# Altium PCB SensorBoard.PcbDoc (part 5 of 5)
Units mm, origin at the board's own origin, x right, y up, seen from the top; angles counter-clockwise.
Board outline 133.86 x 67.84 mm, 4 copper layers (Top Layer, Power Plane, Ground Plane, Bottom Layer), stack 1.586 mm thick; 244 components, 150 nets, 825 pads, 904 vias.
Unrouted connection lines stored in the file: 43.
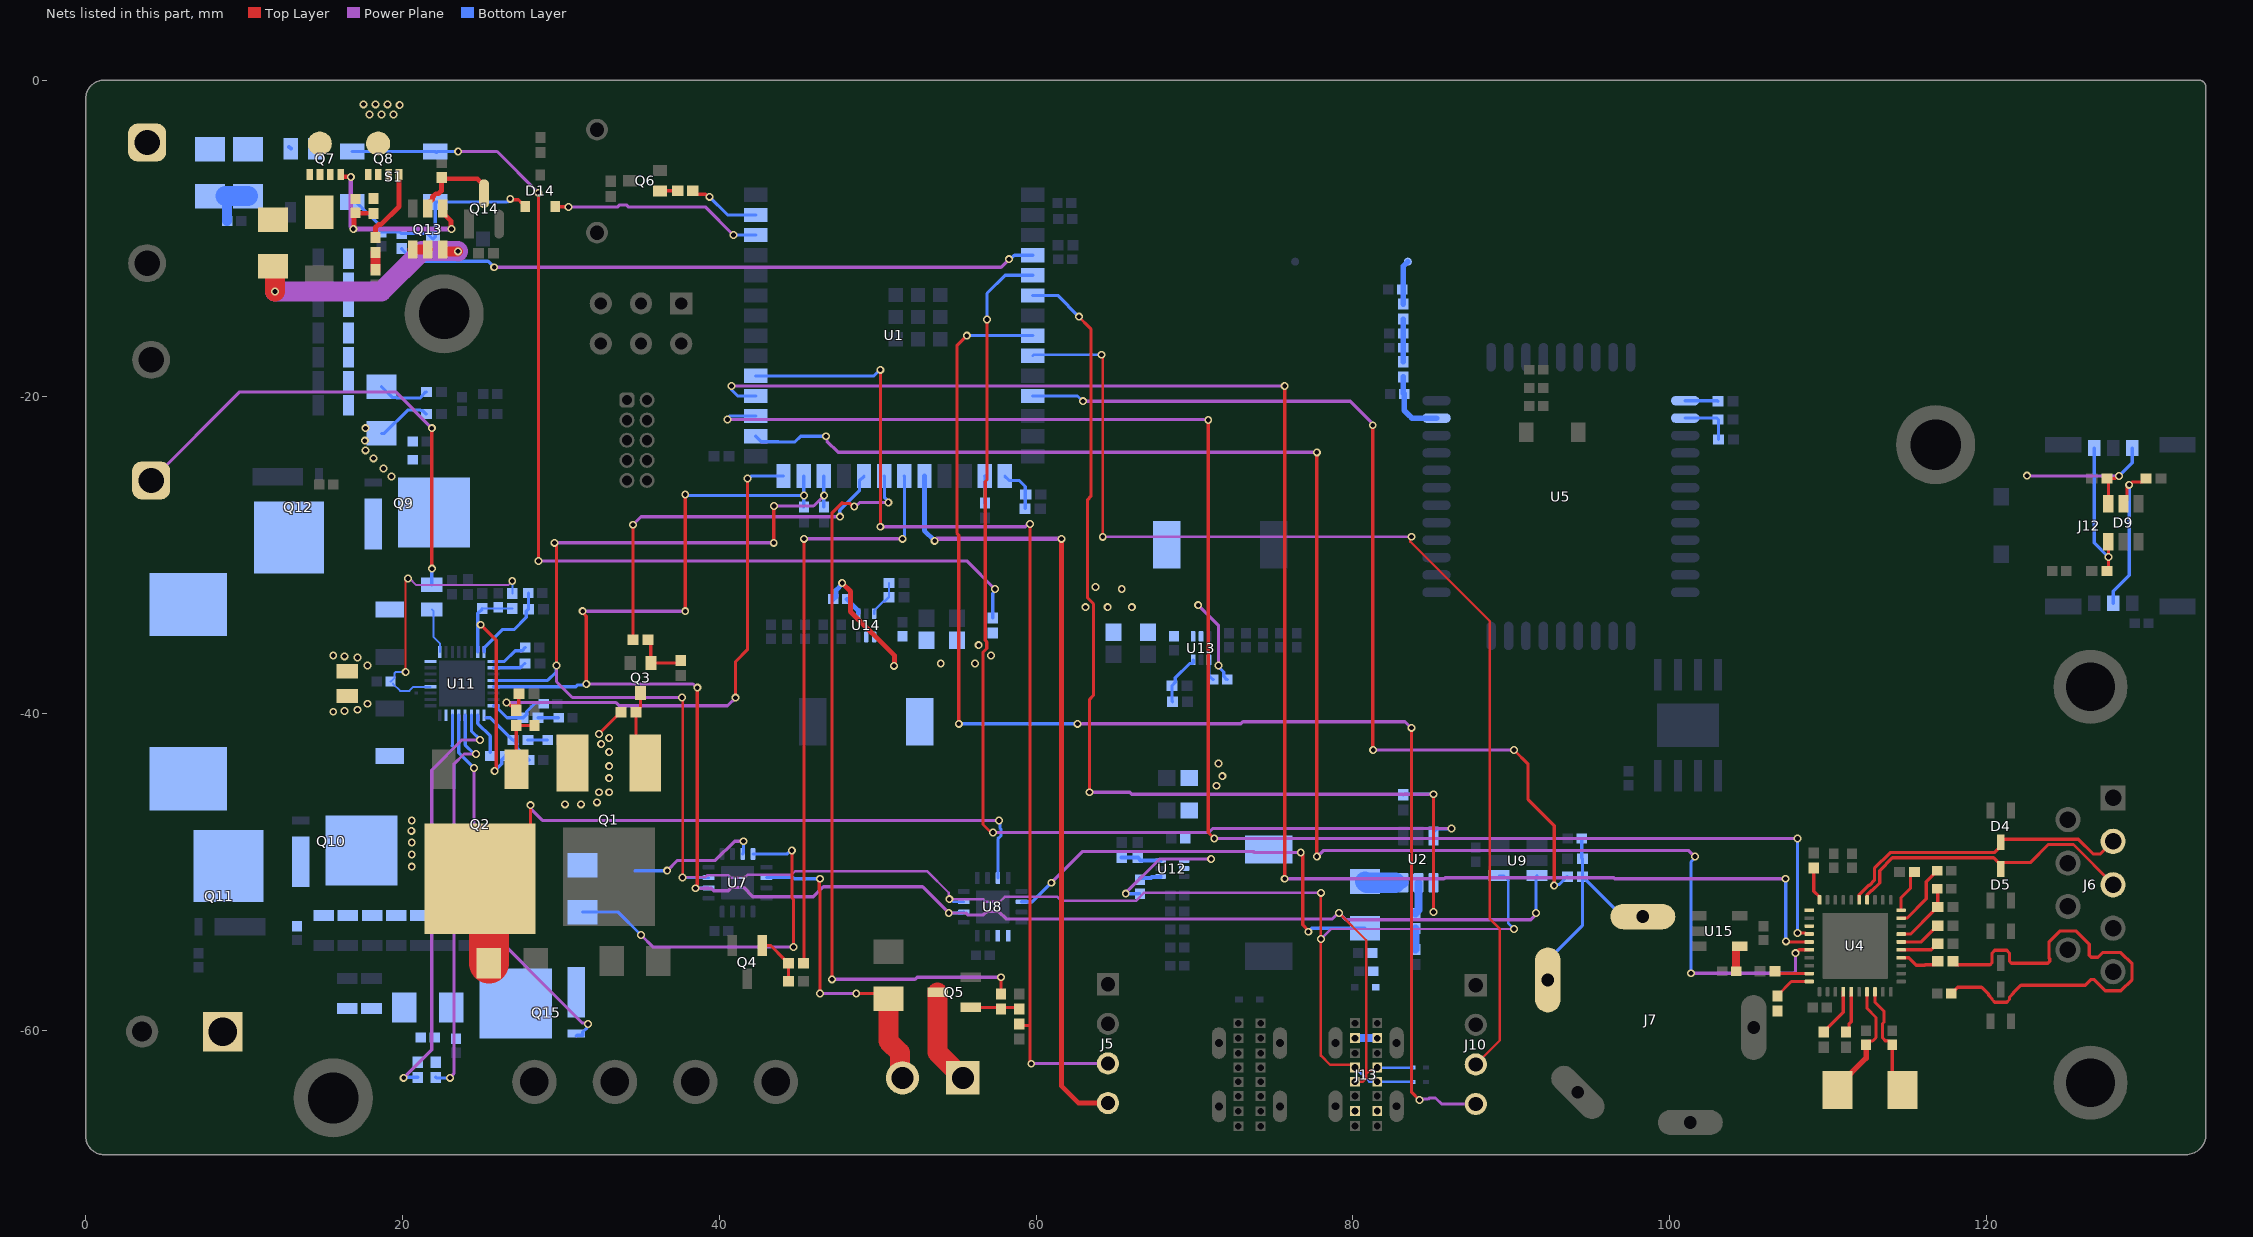
[diagram p5: the nets of this part, all layers, seen from the top]

## Via types
v1: diameter 0.5, hole 0.3, Top Layer to Bottom Layer, tented both sides, 566 vias
v2: diameter 0.5, hole 0.3, Top Layer to Bottom Layer, 318 vias
v3: diameter 0.5, hole 0.2, Top Layer to Bottom Layer, 20 vias

## Nets (pads, with @x,y where several pads share a name; then routed paths per layer and width w, separated by ;. In a path a pad name is that pad's centre, name@x,y a point inside that pad or via, vN(x,y) a via of type N, cw(c..) or ccw(c..) an arc to the next point about the centre after c; other vN are vias at no path point) (continued)
NetC6_2: C6.2 U4.38 Y1.1 | length 7.1
  Top Layer w0.203: U4.38@112.963,-57.56 112.963,-58.226 113.538,-58.801 113.538,-59.459 113.437,-59.56 113.437,-60.47 113.614,-60.647 113.722,-60.647 113.742,-60.667 113.841,-60.667 114.049,-60.875 114.049,-63.104 Y1.1@114.699,-63.754
NetC7_2: C7.2 R28.1 | length 30.2
  Top Layer w0.203: C7.2@117.788,-57.658 117.808,-57.658 118.189,-57.277 119.696,-57.277 120.142,-57.723 120.142,-57.785 120.352,-57.995 120.352,-58.045 120.529,-58.222 121.279,-58.222 121.456,-58.045 121.456,-57.906 121.706,-57.655 121.706,-57.618 122.174,-57.15 126.238,-57.15 126.613,-56.775 126.782,-56.775 127.495,-57.489 128.491,-57.489 129.195,-56.784 129.195,-55.788 128.491,-55.084 127.33,-55.084 127.043,-55.372 126.611,-55.372 126.492,-55.253 126.492,-54.558 125.646,-53.713 124.651,-53.713 123.946,-54.417 123.946,-55.413 123.999,-55.466 123.999,-55.634 123.88,-55.753 121.575,-55.753 121.456,-55.634 121.456,-55.112 121.279,-54.935 120.529,-54.935 120.352,-55.112 120.352,-55.73 120.233,-55.849 118.101,-55.849 R28.1@117.878,-55.626
NetC8_2: C8.2 R32.2 U4.7 | length 4.2
  Top Layer w0.203: U4.7@114.613,-53.91 115.218,-53.91 116.68,-52.448 116.68,-52.423 116.903,-52.2 R32.2@116.928,-52.2 116.928,-51.077 C8.2@116.908,-51.057
NetC9_2: C9.2 U4.9 | length 4.2
  Top Layer w0.203: U4.9@114.613,-52.91 114.626,-52.897 114.997,-52.897 116.205,-51.689 116.205,-50.597 116.888,-49.914 C9.2@116.908,-49.914
NetC10_2: C10.2 U4.37 Y1.2 | length 7.6
  Top Layer w0.203: C10.2@112.398,-60.895 112.398,-60.875 112.606,-60.667 112.813,-60.667 113.03,-60.45 113.03,-59.182 112.463,-58.615 U4.37@112.463,-57.56
  Top Layer w0.35: Y1.2@110.599,-63.754 110.599,-63.504 111.374,-62.729 111.419,-62.729 112.398,-61.75 C10.2@112.398,-60.895
NetC17_2: C17.2 R39.2 U5.32 | length 4.4
  Bottom Layer w0.35: R39.2@83.185,-18.73 83.185,-19.753 ccw(c83.244,-19.753) C17.2@83.244,-19.812 83.244,-20.851 83.488,-21.094 83.731,-21.338 84.076,-21.338 U5.32@85.279,-21.338
NetC18_2: C18.2 C19.2 R39.1 R40.2 | length 2.7
  Bottom Layer w0.35: R39.1@83.185,-17.78 R40.2@83.185,-15.08
NetC20_2: C20.2 R40.1 RF_PCB1.1 | length 2.8
  Bottom Layer w0.35: R40.1@83.185,-14.13 83.185,-11.744 RF_PCB1.1@83.469,-11.46
NetC23_2: C23.2 J7.3 J7.5 R44.1 R45.1 | length 14.7
  Bottom Layer w0.203: J7.5@92.306,-56.809 92.306,-55.559 94.489,-53.376 R44.1@94.489,-50.292 ; C23.2@94.454,-47.879 94.454,-49.114 R45.1@94.489,-49.149 R44.1@94.489,-50.292 ; J7.3@98.306,-52.809 97.031,-52.809 94.514,-50.292 R44.1@94.489,-50.292
NetC27_2: C27.2 C28.2 Q9.5-6-7-8 R47.1 R48.1 R54.2 | length 3.5
  Bottom Layer w0.203: R48.1@18.669,-22.303 18.844,-22.303 20.319,-20.828 21.129,-20.828 21.159,-20.859 21.273,-20.859 R54.2@21.496,-21.082
  other v2: 17.78,-36.957 17.145,-36.449 16.325,-36.377 15.621,-36.322 19.304,-25.019 18.796,-24.511 18.161,-23.876 17.653,-23.368 17.612,-22.758 17.653,-21.971
NetC30_1: C30.1 C31.1 C32.1 C33.1 C44.1 C45.1 C46.1 C47.1 Q8.5-6-7-8 R46.2 R48.2 R53.2 | length 3.3
  Bottom Layer w0.203: R48.2@18.669,-19.353 19.342,-20.026 19.597,-20.026 19.636,-20.066 21.115,-20.066 21.248,-19.933 21.248,-19.908 21.471,-19.685 R53.2@21.496,-19.685
  other v1: 17.907,-2.159 18.669,-2.159 19.431,-2.159 19.812,-1.56 17.526,-1.524 18.288,-1.524 19.05,-1.524
NetC40_2: C40.2 R50.2 R51.2 | length 3
  Bottom Layer w0.635: 8.822,-7.317 8.919,-7.414 C40.2@8.919,-8.89
  Bottom Layer w1.27: 8.822,-7.317 R51.2@10.248,-7.317
NetC43_1: C43.1 Q7.4 Q13.4 R56.1 | length 14.1
  Top Layer w0.305: Q7.4@16.088,-5.945 16.088,-6.038 16.146,-6.096 16.706,-6.096 v2(16.73,-6.12) ; v2(16.891,-9.398) 16.928,-9.361 16.928,-8.472 C43.1@17.018,-8.382 17.035,-8.4 18.143,-8.4 R56.1@18.161,-8.417 ; Q13.4@22.54,-8.098 22.54,-8.373 23.053,-8.886 23.053,-9.361 v2(23.09,-9.398)
  Power Plane w0.305: v2(16.73,-6.12) 16.73,-9.237 v2(16.891,-9.398) v2(23.09,-9.398)
NetC43_2: C43.2 D13.2 Q7.1 Q7.2 Q7.3 Q8.1 Q8.2 Q8.3 R55.1 R56.2
NetC56_2: C56.2 C57.2 Q15.5-6-7-8 R59.2 R61.2
NetC60_2: C60.2 R66.1 | length 1.2
  Bottom Layer w0.203: R66.1@27.907,-41.656 C60.2@29.151,-41.656
NetC62_2: C62.2 R66.2 U11.17 | length 4
  Bottom Layer w0.203: 25.273,-40.259 25.535,-40.259 26.932,-41.656 R66.2@26.957,-41.656 26.982,-41.656 27.205,-41.879 27.205,-42.143 27.988,-42.926 C62.2@28.008,-42.926
NetC63_1: C63.1 R68.1 U11.8 | length 5.3
  Bottom Layer w0.203: U11.8@25.149,-36.1 25.149,-35.828 26.289,-34.688 27.034,-34.688 27.81,-33.912 27.81,-33.531 27.942,-33.399 C63.1@27.942,-32.385
NetC65_1: C65.1 R71.1 U11.16 | length 3.8
  Bottom Layer w0.203: U11.16@25.749,-39.5 26.021,-39.5 26.022,-39.502 26.022,-39.689 26.592,-40.259 R71.1@27.592,-40.259 ; R71.1@27.617,-40.259 27.84,-40.036 27.84,-39.859 28.375,-39.324 C65.1@28.621,-39.324
NetC66_1: C66.1 U11.9 | length 2.4
  Bottom Layer w0.203: U11.9@25.749,-36.7 26.435,-36.7 27.113,-36.022 27.546,-36.022 C66.1@27.754,-35.814
NetC67_1: C67.1 R71.2 | length 1.3
  Bottom Layer w0.203: R71.2@28.542,-40.259 C67.1@29.845,-40.259
NetC68_1: C68.1 L2.1 U12.2 | length 7.2
  Power Plane w0.203: v2(65.659,-51.363) 65.659,-51.308 67.795,-49.172 v2(71.049,-49.172)
  Bottom Layer w0.203: v2(65.659,-51.363) 66.544,-51.363 C68.1@66.548,-51.367
NetC68_2: C68.2 U12.4 | length 1.3
  Bottom Layer w0.254: C68.2@66.548,-50.36 67.239,-50.36 67.3,-50.299 67.839,-50.299 U12.4@67.862,-50.276
NetC77_2: C77.2 D14.1 D15.2 R75.2 S1.3 S1.4 | length 14.7
  Top Layer w0.203: v2(26.797,-7.493) 26.854,-7.55 27.317,-7.55 27.504,-7.737 27.554,-7.737 27.752,-7.935 D14.1@27.752,-7.985
  Bottom Layer w0.203: S1.4@16.806,-7.696 17.081,-7.696 18.461,-9.076 18.461,-9.385 C77.2@18.669,-9.593 19.847,-9.593 R75.2@19.939,-9.685 21.572,-9.685 D15.2@21.92,-10.033 22.056,-9.897 S1.3@22.056,-7.696 26.594,-7.696 v2(26.797,-7.493)
NetC78_1: C78.1 L3.1 U13.2 | length 5.5
  Power Plane w0.203: v2(70.231,-33.147) 71.519,-34.435 71.519,-36.95 v2(71.51,-36.958)
  Bottom Layer w0.203: v2(71.51,-36.958) 71.51,-37.039 71.84,-37.368 71.84,-37.638 72.048,-37.846 C78.1@72.068,-37.846
NetC78_2: C78.2 U13.4 | length 1.4
  Bottom Layer w0.203: U13.4@70.915,-36.601 70.915,-37.593 71.168,-37.846 C78.2@71.188,-37.846
NetC87_1: C87.1 L4.1 U14.2 | length 7.9
  Top Layer w0.3: v2(47.752,-31.75) 48.279,-32.277 48.279,-33.547 51.054,-36.322 51.054,-36.957 51.049,-36.957 v2(51.027,-36.979)
  Bottom Layer w0.3: C87.1@47.185,-32.766 47.205,-32.766 47.365,-32.606 47.365,-32.191 47.752,-31.804 v2(47.752,-31.75)
NetC87_2: C87.2 U14.4 | length 1.2
  Bottom Layer w0.3: C87.2@48.065,-32.766 48.085,-32.766 48.245,-32.926 48.245,-32.961 48.776,-33.492 U14.4@48.776,-33.677
NetC97_2: C97.2 U15.4 | length 1.8
  Top Layer w0.508: C97.2@104.199,-56.261 104.199,-54.717 104.245,-54.671 U15.4@104.424,-54.671
NetD14_2: D14.2 U1.38 | length 13.5
  Top Layer w0.203: D14.2@29.652,-7.985 30.464,-7.985 v2(30.48,-8.001)
  Power Plane w0.203: v2(30.48,-8.001) 33.577,-8.001 33.7,-7.878 34.118,-7.878 34.241,-8.001 39.116,-8.001 v2(40.894,-9.779)
  Bottom Layer w0.203: v2(40.894,-9.779) U1.38@42.291,-9.779
NetJ5_3: J5.3 R16.2 U1.31 | length 67.2
  Top Layer w0.203: v2(50.165,-28.194) v2(50.165,-18.288) ; R16.2@58.928,-59.596 59.022,-59.69 59.619,-59.69 ; v2(59.619,-28.019) 59.619,-59.69 ; v2(59.69,-62.103) 59.619,-62.032 59.619,-59.69
  Power Plane w0.203: v2(50.165,-28.194) 59.309,-28.194 59.484,-28.019 v2(59.619,-28.019) ; v2(59.69,-62.103) 59.7,-62.093 64.523,-62.093 J5.3@64.533,-62.083
  Bottom Layer w0.203: U1.31@42.291,-18.669 49.761,-18.669 50.142,-18.288 v2(50.165,-18.288)
NetJ5_4: J5.4 U1.19 | length 50.3
  Top Layer w0.3: v2(61.595,-28.956) 61.595,-63.5 62.678,-64.583 J5.4@64.533,-64.583
  Power Plane w0.3: v2(53.594,-29.083) 53.721,-28.956 v2(61.595,-28.956)
  Bottom Layer w0.3: U1.19@52.946,-24.999 52.946,-28.435 v2(53.594,-29.083)
NetJ10_3: J10.3 U1.9 | length 71.8
  Top Layer w0.152: v2(64.125,-17.338) 64.201,-17.338 64.262,-17.399 64.204,-17.457 v2(64.204,-28.834) ; v2(83.693,-28.829) 83.629,-28.893 83.629,-29.146 88.646,-34.163 88.646,-52.959 89.281,-53.594 89.281,-60.619 J10.3@87.757,-62.143
  Power Plane w0.152: v2(64.204,-28.834) 64.199,-28.829 v2(83.693,-28.829)
  Bottom Layer w0.152: U1.9@59.791,-17.399 59.852,-17.338 v2(64.125,-17.338)
NetJ10_4: J10.4 U1.8 | length 85.2
  Top Layer w0.203: v2(55.118,-40.64) 55.118,-28.721 54.995,-28.598 54.995,-16.76 v2(55.626,-16.129) ; v2(83.693,-40.894) 83.693,-63.881 v2(84.201,-64.389)
  Power Plane w0.203: v2(62.611,-40.64) 72.927,-40.64 73.054,-40.513 83.289,-40.513 83.67,-40.894 v2(83.693,-40.894) ; v2(84.201,-64.389) 84.258,-64.332 84.745,-64.332 84.815,-64.262 85.217,-64.262 85.598,-64.643 J10.4@87.757,-64.643
  Bottom Layer w0.203: v2(55.118,-40.64) v2(62.611,-40.64) ; v2(55.626,-16.129) U1.8@59.791,-16.129
NetQ1_1: Q1.1 Q3.3 R8.2 | length 4.8
  Top Layer w0.2: Q3.3@35.02,-38.69 35.02,-39.612 34.983,-39.649 34.983,-39.674 34.758,-39.899 R8.2@34.733,-39.899 34.733,-42.521 Q1.1@35.31,-43.098
NetQ2_1: Q2.1 R9.1 R11.2 | length 3.9
  Top Layer w0.2: Q2.1@27.192,-43.519 27.178,-43.505 R9.1@27.178,-40.734 R11.2@28.321,-40.734
NetQ2_4: Q2.4 R7.2 U8.11 | length 45.4
  Top Layer w0.203: Q2.4@24.892,-50.419 28.072,-47.239 v2(28.072,-45.774)
  Top Layer w2.54: Q2.4@24.892,-50.419 25.449,-50.976 R7.2@25.449,-55.753
  Power Plane w0.203: v2(28.072,-45.774) 28.067,-45.779 28.067,-45.974 28.829,-46.736 v2(57.658,-46.736)
  Bottom Layer w0.203: U8.11@57.583,-50.372 57.583,-47.905 57.781,-47.707 57.781,-47.289 57.715,-47.223 57.715,-46.793 v2(57.658,-46.736)
NetQ3_1: Q3.1 R10.1 R12.2 | length 3.5
  Top Layer w0.2: R10.1@35.495,-35.327 35.67,-35.503 Q3.1@35.67,-36.79 37.4,-36.79 R12.2@37.56,-36.63
NetQ4_1: Q4.1 R14.1 R15.2 | length 3.3
  Top Layer w0.203: Q4.1@42.699,-54.637 43.24,-54.637 44.108,-55.505 44.108,-55.53 44.356,-55.778 R15.2@44.356,-56.896
NetQ5_1: Q5.1 R22.1 R23.2 | length 3.1
  Top Layer w0.203: Q5.1@55.88,-58.547 58.834,-58.547 R23.2@58.928,-58.641
NetQ6_1: Q6.1 R35.1 | length 1.1
  Top Layer w0.203: Q6.1@36.256,-7 36.271,-6.985 R35.1@37.371,-6.985
NetQ8_4: Q8.4 R52.2 | length 4.7
  Top Layer w0.305: R52.2@18.288,-9.939 18.288,-9.298 18.467,-9.119 18.632,-9.119 19.771,-7.98 Q8.4@19.771,-5.945
NetQ13_1: Q13.1 Q13.2 | length 1
  Top Layer w0.635: Q13.1@20.64,-10.698 Q13.2@21.59,-10.698
NetQ13_3: Q13.3 R55.2 | length 15.3
  Top Layer w0.635: Q13.3@22.54,-10.698 22.54,-10.79 22.557,-10.808 v2(23.495,-10.808)
  Top Layer w1.27: R55.2@11.811,-11.762 11.938,-11.889 v2(11.938,-13.335)
  Power Plane w1.27: v2(11.938,-13.335) 18.669,-13.335 21.209,-10.795 23.482,-10.795 v2(23.495,-10.808)
NetQ13_5: Q13.5 Q14.3 R58.1 | length 5.7
  Top Layer w0.305: Q13.5@21.59,-8.098 21.59,-7.823 21.888,-7.525 21.888,-7.377 22.094,-7.171 22.267,-7.171 22.446,-6.992 22.446,-6.223 24.72,-6.223 25.146,-6.649 Q14.3@25.146,-7.168
NetQ15_4: Q15.4 U11.21 | length 24.3
  Power Plane w0.203: v2(24.511,-43.434) 24.511,-52.705 31.335,-59.529 31.565,-59.529 31.624,-59.588 v2(31.704,-59.588)
  Bottom Layer w0.203: U11.21@23.549,-40.1 23.549,-42.472 v2(24.511,-43.434) ; Q15.4@30.969,-60.346 31.013,-60.302 31.373,-60.302 31.373,-60.094 31.648,-59.819 31.648,-59.645 v2(31.704,-59.588)
NetR3_2: R3.2 R9.2 U1.26 | length 33.2
  Top Layer w0.203: v2(26.563,-39.3) 26.643,-39.3 26.84,-39.497 R9.2@27.338,-39.497 ; R9.2@27.178,-39.784 27.338,-39.624 R9.2@27.338,-39.497 ; R3.2@27.338,-38.735 R9.2@27.338,-39.497 ; v2(41.021,-38.989) 41.021,-36.703 41.783,-35.941 v2(41.783,-25.146)
  Power Plane w0.203: v2(26.563,-39.3) 33.48,-39.3 33.677,-39.497 40.513,-39.497 v2(41.021,-38.989)
  Bottom Layer w0.203: v2(41.783,-25.146) 41.863,-25.146 42.01,-24.999 U1.26@44.056,-24.999
NetR4_2: R4.2 U1.16 | length 1.7
  Bottom Layer w0.203: U1.16@56.756,-24.999 56.769,-25.012 R4.2@56.769,-26.703
NetR10_2: R10.2 U1.22 | length 23.8
  Top Layer w0.2: v2(34.544,-28.067) 34.545,-28.068 R10.2@34.545,-35.327
  Power Plane w0.2: v2(34.544,-28.067) 35.052,-27.559 v2(47.619,-27.559)
  Bottom Layer w0.2: v2(47.619,-27.559) 47.6,-27.54 47.6,-27.162 48.838,-25.925 48.838,-25.297 U1.22@49.136,-24.999
NetR14_2: R14.2 U1.20 | length 37
  Top Layer w0.203: R14.2@45.306,-55.753 45.339,-55.72 v2(45.339,-28.956)
  Power Plane w0.203: v2(45.339,-28.956) v2(51.562,-28.956)
  Bottom Layer w0.203: v2(51.562,-28.956) 51.562,-28.876 51.689,-28.749 51.689,-25.012 U1.20@51.676,-24.999
NetR18_1: R18.1 U1.6 U2.4 | length 67.4
  Top Layer w0.203: v2(62.701,-14.931) 62.628,-14.859 62.611,-14.859 63.459,-15.707 63.459,-26.27 63.25,-26.479 63.25,-32.692 63.623,-33.065 63.623,-38.846 63.373,-39.096 v2(63.373,-44.958) ; v2(85.09,-52.524) v2(85.09,-45.085)
  Power Plane w0.203: v2(63.373,-44.958) 65.913,-44.958 66.04,-45.085 v2(85.09,-45.085)
  Bottom Layer w0.203: U1.6@59.791,-13.589 61.358,-13.589 v2(62.701,-14.931) ; R18.1@83.185,-45.118 83.218,-45.085 v2(85.09,-45.085) ; U2.4@85.085,-50.673 85.087,-50.675 85.087,-52.521 v2(85.09,-52.524)
NetR19_2: R19.2 U2.6 | length 2.4
  Bottom Layer w0.635: 82.677,-50.673 U2.6@83.185,-50.673
  Bottom Layer w1.27: R19.2@80.772,-50.595 80.85,-50.673 82.677,-50.673
NetR20_1: R20.1 R21.2 | length 1.3
  Bottom Layer w0.5: R21.2@83.947,-54.897 R20.1@83.947,-53.561
NetR20_2: R20.2 U2.5 | length 2
  Bottom Layer w0.5: R20.2@83.947,-52.611 83.947,-52.586 84.135,-52.398 U2.5@84.135,-50.673
NetR22_2: R22.2 U1.21 | length 47
  Top Layer w0.2: v2(47.117,-56.769) 47.117,-27.305 47.752,-26.67 47.8,-26.718 48.227,-26.718 48.432,-26.923 v2(48.513,-26.923) ; R22.2@57.785,-57.691 v2(57.785,-56.642)
  Power Plane w0.2: v2(47.117,-56.769) 52.359,-56.769 52.486,-56.642 v2(57.785,-56.642) ; v2(48.513,-26.923) 48.595,-26.923 48.848,-26.67 v2(50.669,-26.67)
  Bottom Layer w0.2: U1.21@50.406,-24.999 50.419,-25.012 50.419,-26.339 50.669,-26.589 v2(50.669,-26.67)
NetR24_1: R24.1 U4.20 | length 2.2
  Top Layer w0.203: R24.1@109.093,-49.751 109.093,-51.205 109.463,-51.575 U4.20@109.463,-51.76
NetR25_1: R25.1 U4.29 | length 2.2
  Top Layer w0.203: R25.1@106.65,-56.264 106.796,-56.41 U4.29@108.813,-56.41
NetR26_2: R26.2 U4.35 | length 2.7
  Top Layer w0.203: R26.2@111.128,-60.107 111.319,-59.916 111.319,-59.599 111.463,-59.455 U4.35@111.463,-57.56
NetR27_2: R27.2 U4.34 | length 3.1
  Top Layer w0.203: R27.2@109.731,-60.107 109.731,-60.082 110.963,-58.85 U4.34@110.963,-57.56
NetR28_2: R28.2 U4.4 | length 2.6
  Top Layer w0.203: U4.4@114.613,-55.41 115.1,-55.41 115.57,-55.88 116.109,-55.88 116.14,-55.849 116.705,-55.849 R28.2@116.928,-55.626
NetR29_2: R29.2 U4.5 | length 2.5
  Top Layer w0.203: U4.5@114.613,-54.91 116.526,-54.91 116.903,-54.533 R29.2@116.928,-54.533
NetR30_2: R30.2 U4.6 | length 2.7
  Top Layer w0.203: U4.6@114.613,-54.41 115.883,-54.41 116.903,-53.39 R30.2@116.928,-53.39
NetR31_2: R31.2 U4.10 | length 2.8
  Top Layer w0.203: U4.10@114.613,-52.41 114.613,-51.602 115.209,-51.006 115.209,-50.211 115.432,-49.988 R31.2@115.457,-49.988
NetR33_1: R33.1 U4.30 | length 2.4
  Top Layer w0.203: R33.1@106.807,-57.818 106.807,-57.793 107.69,-56.91 U4.30@108.813,-56.91
NetR33_2: R33.2
NetR35_2: R35.2 U1.39 | length 4.8
  Top Layer w0.203: R35.2@38.448,-6.858 R35.2@38.321,-6.985 38.544,-7.208 39.132,-7.208 39.29,-7.366 v2(39.37,-7.366)
  Bottom Layer w0.203: v2(39.37,-7.366) 40.513,-8.509 U1.39@42.291,-8.509
NetR36_1: R36.1 U5.1 | length 2.1
  Bottom Layer w0.2: U5.1@100.979,-20.238 103.018,-20.238 R36.1@103.059,-20.279
NetR37_2: R37.2 R38.1 U5.2 | length 3.4
  Bottom Layer w0.2: U5.2@100.979,-21.338 102.975,-21.338 R37.2@103.059,-21.422 103.092,-21.455 R38.1@103.092,-22.692
NetR44_2: R44.2 U1.11 | length 62.5
  Top Layer w0.203: v2(81.254,-21.789) 81.254,-42.265 v2(81.28,-42.291) ; v2(90.17,-42.291) 91.059,-43.18 91.059,-45.424 92.71,-47.075 v2(92.71,-50.84)
  Power Plane w0.203: v2(62.955,-20.266) 79.829,-20.266 81.28,-21.717 81.28,-21.763 v2(81.254,-21.789) ; v2(81.28,-42.291) v2(90.17,-42.291)
  Bottom Layer w0.203: U1.11@59.791,-19.939 62.611,-19.939 62.992,-20.32 62.992,-20.303 v2(62.955,-20.266) ; v2(92.71,-50.84) 92.767,-50.783 93.023,-50.783 93.514,-50.292 R44.2@93.539,-50.292
NetR52_1: R52.1 R57.2 | length 1.1
  Top Layer w0.635: R57.2@18.288,-11.971 R52.1@18.288,-10.889
NetR61_1: R61.1 U11.20 | length 25.3
  Power Plane w0.203: v2(22.987,-62.992) 22.987,-62.979 23.241,-62.725 23.241,-43.18 23.876,-42.545 v2(24.638,-42.545)
  Bottom Layer w0.203: R61.1@22.098,-62.959 22.131,-62.992 v2(22.987,-62.992) ; U11.20@23.949,-40.1 23.949,-41.983 24.511,-42.545 v2(24.638,-42.545)
NetR62_1: R62.1 U11.19 | length 26.7
  Power Plane w0.203: v2(20.066,-62.992) 21.844,-61.214 21.844,-43.561 23.749,-41.656 v2(24.892,-41.656)
  Bottom Layer w0.203: v2(20.066,-62.992) 20.099,-62.959 R62.1@20.955,-62.959 ; U11.19@24.349,-40.1 24.349,-41.113 v2(24.892,-41.656)
NetR64_2: R64.2 U11.18 | length 2.7
  Bottom Layer w0.203: U11.18@24.749,-40.1 24.749,-40.624 25.527,-41.402 R64.2@25.527,-42.451
NetR70_1: R70.1 U11.10 | length 2.1
  Bottom Layer w0.203: U11.10@25.749,-37.1 27.424,-37.1 27.694,-36.83 R70.1@27.719,-36.83
NetR72_2: R72.2 S1.1 S1.2 | length 67.6
  Top Layer w0.203: v2(28.575,-30.353) v2(28.575,-7.112)
  Power Plane w0.203: v2(23.509,-4.501) 25.964,-4.501 v2(28.575,-7.112) ; v2(28.575,-30.353) 55.626,-30.353 v2(57.404,-32.131)
  Bottom Layer w0.203: S1.2@16.806,-4.496 S1.1@22.056,-4.496 22.132,-4.572 22.203,-4.501 v2(23.509,-4.501) ; R72.2@57.256,-33.963 57.256,-32.406 57.404,-32.258 v2(57.404,-32.131)
NetR74_1: R74.1 R76.2 U12.6 | length 2.5
  Bottom Layer w0.254: R74.1@65.405,-49.086 R76.2@66.421,-49.086 66.587,-49.253 67.839,-49.253 U12.6@67.862,-49.276
NetR75_1: R75.1 U1.4 | length 40.7
  Power Plane w0.203: v2(25.781,-11.811) 57.785,-11.811 v2(58.293,-11.303)
  Bottom Layer w0.203: R75.1@19.939,-10.635 19.939,-10.66 20.709,-11.43 25.4,-11.43 v2(25.781,-11.811) ; v2(58.293,-11.303) 58.373,-11.303 58.627,-11.049 U1.4@59.791,-11.049
NetR77_1: R77.1 R78.2 U13.6 | length 3.3
  Bottom Layer w0.203: R78.2@68.613,-39.243 68.58,-39.21 R77.1@68.58,-38.227 68.785,-38.022 68.785,-37.732 69.682,-36.834 69.867,-36.834 69.915,-36.786 U13.6@69.915,-36.601
NetR79_1: R79.1 R80.2 U14.6 | length 2.4
  Bottom Layer w0.15: U14.6@49.776,-33.677 49.776,-33.492 50.379,-32.889 50.456,-32.889 R80.2@50.706,-32.639 R79.1@50.706,-31.75
NetR81_1: R81.1 R82.1 U1.15 | length 3
  Bottom Layer w0.203: U1.15@58.026,-24.999 58.3,-25.273 58.928,-25.273 59.309,-25.654 R82.1@59.309,-27.051
NetU1_5: U1.5 U2.3 | length 68.5
  Top Layer w0.203: v2(56.896,-15.113) 56.896,-25.228 56.786,-25.338 56.786,-35.372 56.878,-35.464 56.878,-35.882 56.646,-36.113 56.646,-46.994 57.15,-47.498 v2(57.277,-47.498)
  Power Plane w0.203: v2(57.277,-47.498) 70.915,-47.498 71.169,-47.244 v2(86.233,-47.244)
  Bottom Layer w0.203: v2(56.896,-15.113) 56.896,-13.462 58.039,-12.319 U1.5@59.791,-12.319 ; U2.3@85.085,-47.723 85.085,-47.482 85.308,-47.259 86.218,-47.259 v2(86.233,-47.244)
NetU4_21: U4.21
NetU4_23: U4.23
NetU8_1: U8.1
NetU8_2: U8.2
PHOTOTHERAPY+: J4.2 R17.2 U7.14 | length 20.5
  Top Layer w0.203: v2(46.355,-57.658) 46.355,-51.181 46.312,-51.138 46.312,-50.462 v2(46.355,-50.419) ; v2(48.641,-57.658) 50.341,-57.658 R17.2@50.673,-57.99
  Top Layer w1.27: R17.2@50.673,-57.99 50.673,-60.67 51.403,-61.4 51.403,-62.833 J4.2@51.562,-62.992
  Power Plane w0.203: v2(46.355,-57.658) v2(48.641,-57.658)
  Bottom Layer w0.203: U7.14@42.973,-50.348 44.672,-50.348 44.743,-50.419 v2(46.355,-50.419)
PHOTOTHERAPY-: J4.1 Q5.3 | length 6.1
  Top Layer w1.27: Q5.3@53.78,-57.597 53.78,-61.4 J4.1@55.372,-62.992
REGN: C55.2 R65.2 U11.28 | length 17.9
  Top Layer w0.127: v2(20.192,-37.36) 20.192,-31.37 20.193,-31.369 20.251,-31.369 v2(20.345,-31.464)
  Power Plane w0.127: v2(20.345,-31.464) 20.446,-31.464 20.86,-31.877 26.663,-31.877 26.917,-31.623 v2(26.924,-31.623)
  Bottom Layer w0.127: C55.2@19.236,-37.973 19.256,-37.973 19.503,-37.727 19.503,-37.435 19.577,-37.36 v2(20.192,-37.36) ; C55.2@19.383,-38.1 19.838,-38.555 20.426,-38.555 20.681,-38.3 U11.28@21.749,-38.3 ; R65.2@26.924,-32.418 v2(26.924,-31.623)
SCL: D2.1 J13.A7 J13.B7 R5.2 U1.25 U7.6 U8.6 U9.3 U11.13 | length 128.3
  Top Layer w0.152: v2(79.121,-52.578) 80.843,-54.3 80.843,-62.767 ; J13.B7@80.134,-63.235 80.634,-63.235 80.843,-63.026 80.843,-62.767 ; J13.A7@81.534,-62.335 81.325,-62.544 81.066,-62.544 80.843,-62.767
  Top Layer w0.203: v2(31.369,-33.528) 31.369,-33.608 31.598,-33.838 v2(31.598,-38.125) ; v2(37.846,-33.528) v2(37.846,-26.162) ; v2(38.494,-51.022) 38.481,-51.008 38.481,-50.927 38.608,-50.8 v2(38.608,-38.354)
  Power Plane w0.203: v2(31.369,-33.528) v2(37.846,-33.528) ; v2(31.598,-38.125) 38.341,-38.125 38.57,-38.354 v2(38.608,-38.354) ; v2(38.494,-51.022) 39.488,-51.022 39.643,-51.177 40.557,-51.177 40.765,-50.969 41.531,-50.969 42.12,-51.558 45.935,-51.558 46.566,-50.927 52.832,-50.927 v2(54.483,-52.578) 55.554,-52.578 55.677,-52.701 56.667,-52.701 56.875,-52.493 57.641,-52.493 58.103,-52.955 78.713,-52.955 79.09,-52.578 v2(79.121,-52.578) 79.545,-53.002 91.223,-53.002 91.567,-52.658 v2(91.567,-52.578)
  Bottom Layer w0.152: J13.A7@81.534,-62.335 81.545,-62.346 D2.1@83.781,-62.346
  Bottom Layer w0.203: U11.13@25.749,-38.3 25.751,-38.302 30.942,-38.302 31.062,-38.181 31.542,-38.181 v2(31.598,-38.125) ; v2(37.846,-26.162) 37.904,-26.22 v2@45.326,-26.22 ; v2(38.494,-51.022) 38.506,-51.01 39.311,-51.01 U7.6@39.323,-50.998 ; U1.25@45.326,-24.999 v2@45.326,-26.22 ; R5.2@45.339,-26.957 45.326,-26.944 v2@45.326,-26.22 ; v2(45.345,-26.22) v2@45.326,-26.22 ; v2(54.483,-52.578) 55.038,-52.578 55.045,-52.57 55.385,-52.57 U8.6@55.433,-52.522 ; v2(91.567,-52.578) 91.567,-50.283 U9.3@91.624,-50.226
SDA: D3.1 J13.A6 J13.B6 R6.2 U1.24 U7.7 U8.7 U9.4 U11.12 | length 132.6
  Top Layer w0.152: v2(37.636,-38.974) 37.678,-39.016 v2(37.678,-50.336) ; v2(77.978,-51.308) v2(77.978,-54.229) 77.978,-61.584 78.56,-62.166 79.965,-62.166 J13.B6@80.134,-62.335
  Top Layer w0.203: v2(29.591,-29.21) 29.591,-29.29 29.718,-29.417 v2(29.718,-36.957) ; v2(43.434,-29.21) 43.434,-26.895 v2(43.442,-26.887)
  Power Plane w0.152: v2(37.678,-50.336) 39.088,-50.336 39.23,-50.194 40.546,-50.194 40.703,-50.352 41.593,-50.352 41.779,-50.165 44.564,-50.165 44.788,-49.94 53.115,-49.94 54.483,-51.308 54.483,-51.689 54.501,-51.689 v2(54.522,-51.71) 56.648,-51.71 56.814,-51.876 57.703,-51.876 58.016,-51.562 61.341,-51.562 61.595,-51.816 66.294,-51.816 66.802,-51.308 v2(77.978,-51.308) ; v2(77.978,-54.229) 78.613,-53.594 v2(90.17,-53.594)
  Power Plane w0.203: v2(29.591,-29.21) v2(43.434,-29.21) ; v2(29.718,-36.957) 29.718,-37.973 30.719,-38.974 v2(37.636,-38.974) ; v2(43.442,-26.887) 45.948,-26.887 v2(46.615,-26.22)
  Bottom Layer w0.152: v2(37.678,-50.336) 37.678,-50.333 37.719,-50.292 37.775,-50.348 U7.7@39.323,-50.348 ; v2(54.522,-51.71) 54.616,-51.71 54.778,-51.872 U8.7@55.433,-51.872 ; J13.B6@80.134,-62.335 80.521,-62.722 80.528,-62.722 80.781,-62.975 80.781,-62.982 81.034,-63.235 J13.A6@81.534,-63.235 81.545,-63.246 D3.1@83.781,-63.246 ; U9.4@89.224,-50.226 89.524,-50.226 89.798,-50.5 89.798,-53.222 v2(90.17,-53.594)
  Bottom Layer w0.203: U11.12@25.749,-37.9 29.156,-37.9 29.688,-37.368 29.688,-36.987 v2(29.718,-36.957) ; U1.24@46.596,-24.999 46.596,-26.944 R6.2@46.609,-26.957
SIM_CLK: D9.6 J12.S3 R42.1 | length 10.5
  Top Layer w0.203: D9.6@127.701,-26.74 127.701,-25.245 R42.1@127.602,-25.146 128.143,-25.146 128.291,-24.998 v2(128.366,-24.998)
  Power Plane w0.203: v2(122.557,-24.97) 122.555,-24.972 122.555,-25.019 122.576,-24.998 v2(128.366,-24.998)
  Bottom Layer w0.203: v2(128.366,-24.998) 129.212,-24.152 J12.S3@129.212,-23.221
SIM_DATA: D9.1 J12.S6 R41.1 | length 9.1
  Top Layer w0.203: R41.1@127.602,-30.988 127.701,-30.889 v2(127.701,-30.104) D9.1@127.701,-29.14
  Bottom Layer w0.203: J12.S6@126.812,-23.221 126.812,-29.215 v2(127.701,-30.104)
SIM_RST: D9.5 J12.S2 R43.1 | length 10.5
  Top Layer w0.203: D9.5@128.651,-26.74 128.874,-26.517 128.874,-25.685 v2(129.013,-25.546) 129.19,-25.369 129.858,-25.369 R43.1@130.081,-25.146
  Bottom Layer w0.203: J12.S2@128.012,-33.021 128.012,-32.262 129.013,-31.261 v2(129.013,-25.546)
SPI_MISO: U1.30 U4.25 | length 105.1
  Top Layer w0.203: v2(75.692,-50.419) v2(75.692,-19.304) ; v2(107.339,-54.37) 107.379,-54.41 U4.25@108.813,-54.41
  Power Plane w0.203: v2(40.767,-19.304) v2(75.692,-19.304) ; v2(75.692,-50.419) 85.756,-50.419 85.814,-50.362 96.467,-50.362 96.525,-50.419 v2(107.315,-50.419)
  Bottom Layer w0.203: v2(40.767,-19.304) 40.767,-19.558 41.148,-19.939 U1.30@42.291,-19.939 ; v2(107.315,-50.419) 107.327,-50.431 107.327,-54.358 v2(107.339,-54.37)
SPI_MOSI: U1.28 U4.26 | length 102.2
  Top Layer w0.203: v2(77.724,-49.022) v2(77.724,-23.495) ; v2(107.95,-55.118) 108.158,-54.91 U4.26@108.813,-54.91
  Power Plane w0.203: v2(46.736,-22.479) 46.793,-22.536 46.793,-22.79 47.498,-23.495 v2(77.724,-23.495) ; v2(77.724,-49.022) 77.737,-49.022 78.118,-48.641 101.206,-48.641 101.587,-49.022 v2(101.6,-49.022) ; v2(101.346,-56.388) 107.831,-56.388 107.95,-56.269 v2(107.95,-55.118)
  Bottom Layer w0.203: U1.28@42.291,-22.479 42.639,-22.827 43.732,-22.827 43.749,-22.844 44.769,-22.844 45.134,-22.479 v2(46.736,-22.479) ; v2(101.346,-56.388) 101.346,-49.356 101.6,-49.102 v2(101.6,-49.022)
SPI_SCK: U1.29 U4.24 | length 102.6
  Top Layer w0.203: v2(70.866,-21.463) 70.866,-47.498 v2(71.247,-47.879) ; v2(108.077,-53.848) 108.566,-53.848 108.628,-53.91 U4.24@108.813,-53.91
  Power Plane w0.203: v2(40.516,-21.43) 70.833,-21.43 v2(70.866,-21.463) ; v2(71.247,-47.879) v2(108.077,-47.879)
  Bottom Layer w0.203: v2(40.516,-21.43) 40.419,-21.43 40.64,-21.209 U1.29@42.291,-21.209 ; v2(108.077,-53.848) v2(108.077,-47.879)
SW1: C38.1 L1.1 Q9.1-2-3 Q12.5-6-7-8 U11.32
SW2: C39.1 L1.2 Q10.1-2-3 Q11.5-6-7-8 U11.23
TX_N: D5.3 J6.3 U4.14 | length 19.3
  Top Layer w0.203: U4.14@112.463,-51.76 112.476,-51.747 112.476,-51.434 112.752,-51.158 112.791,-51.158 113.259,-50.69 113.259,-49.903 114.063,-49.098 120.452,-49.098 D5.3@120.904,-49.55 ; D5.3@120.904,-49.8 D5.3@120.904,-49.55 ; J6.3@127.993,-50.8 127.993,-50.757 125.497,-48.26 123.903,-48.26 122.762,-49.402 121.052,-49.402 D5.3@120.904,-49.55
TX_P: D4.3 J6.2 U4.15 | length 19.1
  Top Layer w0.203: U4.15@111.963,-51.76 111.976,-51.747 111.976,-51.434 112.582,-50.828 112.621,-50.828 112.928,-50.521 112.928,-49.766 113.927,-48.768 120.503,-48.768 120.904,-48.367 D4.3@120.904,-48.117 120.904,-48.07 121.052,-47.922 125.811,-47.922 126.746,-48.857 127.193,-48.857 J6.2@127.993,-48.057
V_BAT: C57.1 C58.1 C59.1 J9.1 R59.1 R62.2
V_BUS: R60.1 U11.1 | length 2.9
  Bottom Layer w0.127: R60.1@21.844,-33.414 21.962,-33.532 21.962,-35.17 22.349,-35.557 U11.1@22.349,-36.1
V_DDA: C61.2 R64.1 R65.1 R67.1 U11.7 | length 16
  Top Layer w0.203: v2(24.93,-34.382) 25.908,-35.361 25.908,-43.688 25.834,-43.614 v2(25.811,-43.614)
  Bottom Layer w0.127: R67.1@25.019,-33.368 R65.1@26.924,-33.368
  Bottom Layer w0.203: U11.7@24.749,-36.1 24.749,-34.417 24.895,-34.417 v2(24.93,-34.382) ; v2@24.749,-34.382 24.749,-33.663 25.019,-33.393 R67.1@25.019,-33.368 ; v2(25.811,-43.614) 26.262,-43.164 26.262,-42.895 26.485,-42.672 R64.1@26.51,-42.672
V_IN: J8.1 J11.1 Q7.5-6-7-8 R46.1 R50.1 R51.1 R60.2 | length 32.1
  Top Layer w0.203: v2(21.844,-21.971) 21.844,-30.828 v2(21.859,-30.843)
  Power Plane w0.203: J8.1@5.138,-25.273 J8.1@4.122,-25.273 9.71,-19.685 19.558,-19.685 v2(21.844,-21.971)
  Bottom Layer w0.203: R60.2@21.844,-31.864 21.844,-30.858 v2(21.859,-30.843)
  Bottom Layer w0.254: R46.1@12.827,-4.204 R46.1@12.941,-4.318
V_SYS: C74.2 C75.2 C76.2 C84.2 C85.2 C86.2 C93.2 C94.2 C95.2 Q1.3 R8.1 R49.2 R72.1 U7.11 U12.1 U13.1 U14.1 | length 10.4
  Top Layer w0.2: v2(32.407,-41.278) 32.407,-41.25 33.758,-39.899 R8.1@33.783,-39.899
  Power Plane w0.2: v2(36.703,-49.911) 37.353,-49.261 39.751,-49.261 40.959,-48.053 v2(41.529,-48.053)
  Bottom Layer w0.2: 34.671,-49.911 v2(36.703,-49.911) ; U7.11@41.473,-48.848 41.523,-48.798 41.523,-48.473 41.529,-48.467 v2(41.529,-48.053)
  other v2: 30.248,-45.723 31.264,-45.723 32.28,-45.596 32.407,-44.961 33.042,-44.961 71.394,-44.546 33.042,-44.072 71.755,-43.942 33.042,-43.31 71.521,-43.149 33.042,-42.421 32.534,-41.913 33.042,-41.532 53.975,-36.83 56.134,-36.83 57.15,-36.322 56.374,-35.673 63.119,-33.274 64.516,-33.274 66.04,-33.274 65.405,-32.131 63.754,-32.004
Vsense+: C29.2 C34.1 C35.1 C36.1 C37.1 C48.1 C49.1 C50.1 C51.1 Q10.5-6-7-8 Q15.1-2-3 R47.2 R49.1 U7.12 U11.22 | length 24.9
  Top Layer w0.2: v2(44.577,-48.641) 44.577,-51.61 44.678,-51.711 v2(44.678,-54.737)
  Power Plane w0.2: v2(35.052,-53.975) 35.814,-54.737 v2(44.678,-54.737)
  Bottom Layer w0.2: 23.114,-42.037 23.149,-42.002 U11.22@23.149,-40.1 ; R49.1@31.369,-52.529 33.606,-52.529 v2(35.052,-53.975) ; U7.12@42.123,-48.848 44.289,-48.848 44.496,-48.641 v2(44.577,-48.641)
  other v2: 20.575,-49.658 20.575,-48.896 20.575,-48.134 20.549,-47.397 20.575,-46.737 15.621,-39.878 16.325,-39.823 17.145,-39.751 17.78,-39.37
VUSB: C4.2 C5.2 D1.2 J13.A4 J13.A9 J13.B4 J13.B9 R19.1 U8.14 | length 29.3
  Top Layer w0.203: v2(76.708,-48.768) 76.716,-48.768 76.835,-48.887 76.835,-53.337 77.186,-53.687 v2(77.186,-53.768)
  Power Plane w0.203: v2(60.96,-50.673) 62.94,-48.693 73.71,-48.693 73.784,-48.768 v2(76.708,-48.768)
  Bottom Layer w0.203: U8.14@59.083,-51.872 59.761,-51.872 v2(60.96,-50.673) ; v2(77.186,-53.768) 77.216,-53.737 77.216,-53.721 77.392,-53.545 R19.1@80.772,-53.545
  Bottom Layer w0.5: J13.B4@80.134,-60.485 J13.A9@81.534,-60.485
pads on no net: D9.3 J2.10 J6.1 J6.4 J6.6 J6.8 J12.1 J12.2 J12.S5 J13.A2 J13.A5 J13.A8 J13.A10 J13.B2 J13.B5 J13.B8 J13.B10 J14.A2 J14.A5 J14.A8 J14.A10 J14.B2 J14.B5 J14.B8 J14.B10 R26.1 R27.1 R29.1 R30.1 R31.1 R32.1 U5.3 U5.4 U5.5 U5.6 U5.7 U5.9 U5.10 U5.11 U5.12 U5.14 U5.20 U5.22 U5.24 U5.25 U5.26 U5.28 U5.29 U5.38 U5.40 U5.41 U5.42 U6.2 U6.4 U6.5 U7.8 U7.9 U7.10 U7.13 U7.16 U7.17@40.578,-50.103 U7.17@40.578,-51.243 U7.17@41.718,-50.103 U7.17@41.718,-51.243 U8.8 U8.9 U8.10 U8.13 U8.16 U8.17@56.689,-51.627 U8.17@56.689,-52.766 U8.17@57.828,-51.627 U8.17@57.828,-52.766 U11.5 U11.11 U11.15

## Polygon pours and split planes (outlines as drawn)
DGND on Top Layer "DGND_L01_P147" (solid, remove dead copper, pour order 147): -1.143,1.397 134.62,1.397 135.763,0.254 135.763,-67.31 132.588,-70.485 0.635,-70.485 -1.524,-68.326
V_SYS on Top Layer "V_SYS_L01_P110" (solid, remove dead copper, pour order 110): 29.718,-41.021 33.528,-41.021 33.528,-46.228 29.718,-46.228
4V@2A on Top Layer "4V@2A_L01_P123" (solid, pour order 123): 91.567,-17.78 91.567,-23.114 91.313,-23.368 89.789,-23.368 89.218,-22.797 89.218,-18.098 89.535,-17.78
Vsense+ on Top Layer "VSENSE+_L01_P125" (solid, pour order 125): 18.415,-39.37 17.272,-40.513 15.621,-40.513 14.986,-39.878 14.986,-38.989 15.748,-38.227 17.907,-38.227
NetC27_2 on Top Layer "NETC27_2_L01_P113" (solid, pour order 113): 18.415,-36.83 17.272,-35.687 15.621,-35.687 14.986,-36.322 14.986,-37.211 15.748,-37.973 17.907,-37.973
NetC43_2 on Top Layer "NETC43_2_L01_P109" (solid, pour order 109): 19.431,-5.207 11.938,-5.207 10.414,-6.731 10.414,-9.525 10.795,-9.906 15.621,-9.906 16.256,-9.271 16.256,-8.255 16.51,-8.001 18.669,-8.001 19.431,-7.239 19.431,-7.112
NetC30_1 on Top Layer "NETC30_1_L01_P103" (solid, remove dead copper, pour order 103): 20.32,-5.08 17.145,-5.08 17.145,-0.889 20.32,-0.889
V_IN on Top Layer "V_IN_L01_P102" (solid, remove dead copper, pour order 102): 16.298,-5.207 6.985,-5.207 6.096,-6.096 6.096,-25.908 5.08,-26.924 -0.508,-26.924 -1.016,-26.416 -1.016,-0.508 -0.127,0.381 0,0.254 16.298,0.254
4V@2A on Bottom Layer "4V@2A_L04_P132" (solid, pour order 132): 90.424,-16.51 90.424,-22.606 90.043,-22.987 89.408,-22.987 89.027,-22.606 89.027,-18.669 88.265,-17.907 88.265,-16.51
DGND on Bottom Layer "DGND_L04_P144" (solid, remove dead copper, pour order 144): -1.143,1.397 134.62,1.397 135.763,0.254 135.763,-67.31 132.588,-70.485 0.635,-70.485 -1.524,-68.326
V_IN on Bottom Layer "V_IN_L04_P106" (solid, remove dead copper, pour order 106): 5.588,-26.416 5.715,-21.463 2.351,-19.022 2.413,-10.033 6.604,-5.842 12.954,-5.842 13.716,-5.08 13.716,0.254 -0.254,0.254 -0.762,-0.254 -0.762,-26.416 2.413,-26.416
NetC27_2 on Bottom Layer "NETC27_2_L04_P112" (solid, pour order 112): 19.685,-21.082 21.082,-22.479 21.082,-24.257 21.844,-25.019 24.384,-25.019 24.384,-29.591 24.257,-29.718 19.685,-29.718 19.558,-29.591 19.558,-25.654 18.034,-24.13 17.399,-23.495 17.399,-21.082
Vsense+ on Bottom Layer "VSENSE+_L04_P116" (solid, pour order 116): 14.795,-46.038 22.987,-41.529 22.987,-39.624 23.368,-39.624 23.368,-42.418 23.368,-46.038 32.258,-51.689 32.258,-59.182 30.099,-59.182 30.099,-54.864 28.575,-53.692 12.925,-53.692 12.573,-53.34 12.573,-52.451 13.335,-51.689 13.843,-51.689 14.732,-50.8
NetC56_2 on Bottom Layer "NETC56_2_L04_P118" (solid, pour order 118): 29.337,-60.96 24.003,-60.96 22.86,-60.96 22.733,-61.087 22.733,-62.23 22.479,-62.484 21.59,-62.484 21.59,-56.388 29.337,-56.388
V_SYS on Bottom Layer "V_SYS_L04_P120" (solid, pour order 120): 30.226,-50.292 30.226,-42.799 32.258,-40.767 33.655,-40.767 35.306,-44.704 35.306,-50.292
V_SYS on Bottom Layer "V_SYS_L04_P121" (solid, pour order 121): 62.357,-33.909 63.881,-35.433 70.104,-35.433 70.104,-34.925 68.707,-33.528 67.691,-33.528 65.659,-31.496 62.357,-31.496
NetC78_1 on Bottom Layer "NETC78_1_L04_P122" (solid, pour order 122): 70.231,-35.56 70.231,-34.417 67.183,-31.369 67.183,-27.432 67.818,-26.797 70.485,-26.797 70.612,-26.924 70.612,-34.671 70.612,-35.56
V_SYS on Bottom Layer "V_SYS_L04_P131" (solid, pour order 131): 49.657,-34.671 49.53,-34.798 49.53,-35.687 49.784,-35.941 51.689,-35.941 52.832,-37.084 57.912,-37.084 57.912,-34.671
NetC87_1 on Bottom Layer "NETC87_1_L04_P133" (solid, remove dead copper, pour order 133): 49.403,-34.671 49.403,-35.941 49.784,-36.322 51.562,-36.322 53.467,-38.227 53.467,-42.037 53.34,-42.164 50.038,-42.164 49.149,-41.275 49.149,-34.671
3v3_dig@2A on Bottom Layer "3V3_DIG@2A_L04_P135" (solid, remove dead copper, pour order 135): 48.26,-34.925 39.243,-34.925 39.116,-35.052 39.116,-35.687 43.561,-40.132 43.561,-41.402 44.196,-42.037 46.736,-42.037 48.26,-40.513
SW2 on Bottom Layer "SW2_L04_P115" (solid, pour order 115): 9.779,-51.054 7.239,-51.054 2.413,-46.228 2.413,-41.275 3.429,-40.259 15.748,-40.259 16.256,-40.767 22.479,-40.767 22.479,-39.624 22.987,-39.624 22.987,-41.282 20.814,-45.971 14.795,-46.038 14.795,-51.054
VUSB on Bottom Layer "VUSB_L04_P140" (solid, remove dead copper, pour order 140): 81.788,-52.705 82.042,-52.959 82.042,-60.706 81.788,-60.96 79.756,-60.96 79.502,-60.706 79.502,-59.182 80.899,-57.785 80.899,-52.705
5V@2A on Bottom Layer "5V@2A_L04_P139" (solid, remove dead copper, pour order 139): 68.961,-50.8 75.311,-50.8 76.327,-51.816 76.327,-56.896 68.961,-56.896
NetC68_1 on Bottom Layer "NETC68_1_L04_P138" (solid, remove dead copper, pour order 138): 70.231,-49.53 72.136,-47.625 76.327,-47.625 76.327,-49.53 75.819,-50.038 68.961,-50.038 68.961,-49.53
V_SYS on Bottom Layer "V_SYS_L04_P137" (solid, pour order 137): 68.961,-49.403 68.961,-43.053 69.342,-42.672 71.374,-42.672 72.263,-43.561 72.263,-45.974 70.866,-47.371 70.866,-48.641 70.104,-49.403
4V@2A on Bottom Layer "4V@2A_L04_P130" (solid, pour order 130): 71.628,-35.306 71.628,-29.083 73.914,-26.797 75.819,-26.797 77.089,-28.067 77.089,-35.306
SW1 on Bottom Layer "SW1_L04_P114" (solid, pour order 114): 9.779,-26.162 8.763,-27.178 8.763,-28.448 7.874,-29.337 4.064,-29.337 2.413,-30.988 2.413,-35.941 3.429,-36.957 15.748,-36.957 17.78,-35.56 20.193,-35.56 21.209,-36.83 22.098,-36.83 22.098,-36.449 20.574,-31.242 19.177,-29.845 19.177,-26.162
V_BAT on Bottom Layer "V_BAT_L04_P117" (solid, pour order 117): 7.112,-57.531 21.209,-57.531 21.463,-57.785 21.463,-62.23 21.209,-62.484 18.796,-62.484 17.018,-60.706 12.954,-60.706 11.557,-62.103 6.985,-62.103
DGND on Bottom Layer "DGND_L04_P141" (solid, pour order 141): 15.367,-37.465 3.048,-37.465 2.54,-37.973 2.54,-39.37 2.921,-39.751 15.367,-39.751
NetC30_1 on Bottom Layer "NETC30_1_L04_P108" (solid, remove dead copper, pour order 108): 20.41,-3.048 16.383,-4.826 16.383,-7.874 17.907,-9.398 17.907,-17.272 19.05,-18.415 19.05,-20.701 18.669,-21.082 15.494,-21.082 15.494,-10.795 13.716,-9.017 13.716,0 20.447,0
DGND on Power Plane "DGND_L02_P146" (solid, remove dead copper, pour order 146): -1.143,1.397 134.62,1.397 135.763,0.254 135.763,-67.31 132.588,-70.485 0.635,-70.485 -1.524,-68.326
NetC27_2 on Power Plane "NETC27_2_L02_P124" (solid, pour order 124): 19.939,-22.606 19.939,-35.56 16.891,-38.608 15.367,-38.608 15.367,-22.733 16.637,-21.463 18.669,-21.463
VUSB on Power Plane "VUSB_L02_P145" (solid, pour order 145): 82.804,-67.056 82.55,-67.31 79.756,-67.31 79.502,-67.056 79.502,-59.563 82.804,-59.563
V_SYS on Power Plane "V_SYS_L02_P128" (solid, pour order 128): 59.563,-34.417 61.74,-31.369 69.193,-31.369 60.538,-42.388 72.263,-42.418 72.263,-44.768 58.801,-44.768 57.643,-46.355 29.083,-46.355 29.083,-43.307 31.877,-40.513 33.655,-40.513 48.895,-40.513 54.949,-34.459
5V@2A on Power Plane "5V@2A_L02_P143" (solid, remove dead copper, pour order 143): 76.581,-57.023 71.374,-51.816 69.596,-51.816 68.961,-52.451 68.961,-66.548 76.581,-66.548
4V@2A on Power Plane "4V@2A_L02_P136" (solid, pour order 136): 74.041,-33.782 85.344,-33.782 92.075,-27.051 92.075,-18.161 91.44,-17.526 90.043,-17.526 89.027,-18.542 89.027,-25.146 83.439,-30.734 74.041,-30.734
Vsense+ on Power Plane "VSENSE+_L02_P127" (solid, pour order 127): 18.288,-38.989 21.527,-42.228 21.527,-50.165 19.983,-50.165 14.732,-40.386 14.732,-38.989
DGND on Ground Plane "DGND_L03_P134" (solid, remove dead copper, pour order 134): -1.143,1.397 134.62,1.397 135.763,0.254 135.763,-67.31 132.588,-70.485 0.635,-70.485 -1.524,-68.326

## Keep-outs
Keep-Out Layer:
  lines w0.254: 1.143,0 ccw(c1.143,0) 1.143,0 ; 1.143,0 ccw(c1.143,-1.143) 0,-1.143 0,-60.476 0,-66.699 ccw(c1.143,-66.699) 1.143,-67.842 132.588,-67.842 ccw(c132.588,-66.572) 133.858,-66.572 133.858,-0.434 ccw(c133.424,-0.434) 133.424,0 1.143,0

## Other copper
Top Layer:
  pour cut-out: 133.873,0.738 133.873,-12.319 63.76,-12.319 63.746,-6.223 39.751,-6.223 34.671,1.031
Power Plane:
  pour cut-out: 133.873,0.738 133.873,-12.319 63.761,-12.319 63.746,-6.223 39.751,-6.223 34.671,1.031
Ground Plane:
  pour cut-out: 133.873,0.738 133.873,-12.319 63.761,-12.319 63.746,-6.223 39.751,-6.223 34.671,1.031
Bottom Layer:
  pour cut-out: 67.945,-69.088 67.945,-56.642 65.405,-54.102 32.258,-54.102 32.257,-51.815 23.368,-45.974 23.574,-32.258 23.826,-32.258 23.622,-45.72 32.519,-51.554 32.512,-53.848 65.659,-53.848 68.326,-56.515 68.326,-68.707
  pour cut-out: 133.873,0.738 133.873,-12.349 63.761,-12.349 63.747,-6.223 39.751,-6.223 34.671,1.031

## Silkscreen, mask and mechanical layers (free items; w line width, h text height)
Top Overlay:
  circle w0.254: c116.793,-23.011 r3.5
  circle w0.254: c15.621,-64.262 r3.5
  circle w0.254: c3.683,-56.134 r0.284
  circle w0.254: c7.62,-66.675 r0.284
  circle w0.254: c8.763,-12.7 r0.284
  circle w0.254: c22.621,-14.756 r3.5
  text "IncuNest" at 98.044,-19.431 h10.16
  text "16.A" at 98.044,-25.781 h8.89
  text "HEATER" at 24.13,-40.386 h4 r90
  text "FAN 1" at 45.085,-52.07 h4 r90
  text "LED" at 54.483,-52.197 h4 r90
  text "FAN 2" at 65.151,-52.324 h4 r90
  text "DISPLAY" at 88.646,-52.451 h4 r90
  text "BATTERY" at 7.366,-53.34 h4 r90
  text "AIR SENSOR" at 75.184,-54.991 h2 r90
Bottom Overlay:
  circle w0.254: c2.794,-12.7 r0.284
  text "PROG" at 35.837,-12.432 h1.07
  text "JTAG" at 32.004,-24.257 h1.07 r90

## Text inside footprints (layer, text, board x,y; h text height)
BUZ1: Mechanical 15 "+" at 31.13,-9.041 h2.76 r90